# Altium PCB SolarSense.PcbDoc (part 1 of 2)
Units mm, origin at the board's own origin, x right, y up, seen from the top; angles counter-clockwise.
Board outline 200 x 150 mm, 2 copper layers (Top Layer, Bottom Layer); 190 components, 120 nets, 670 pads, 0 vias.
Unrouted connection lines stored in the file: 491.
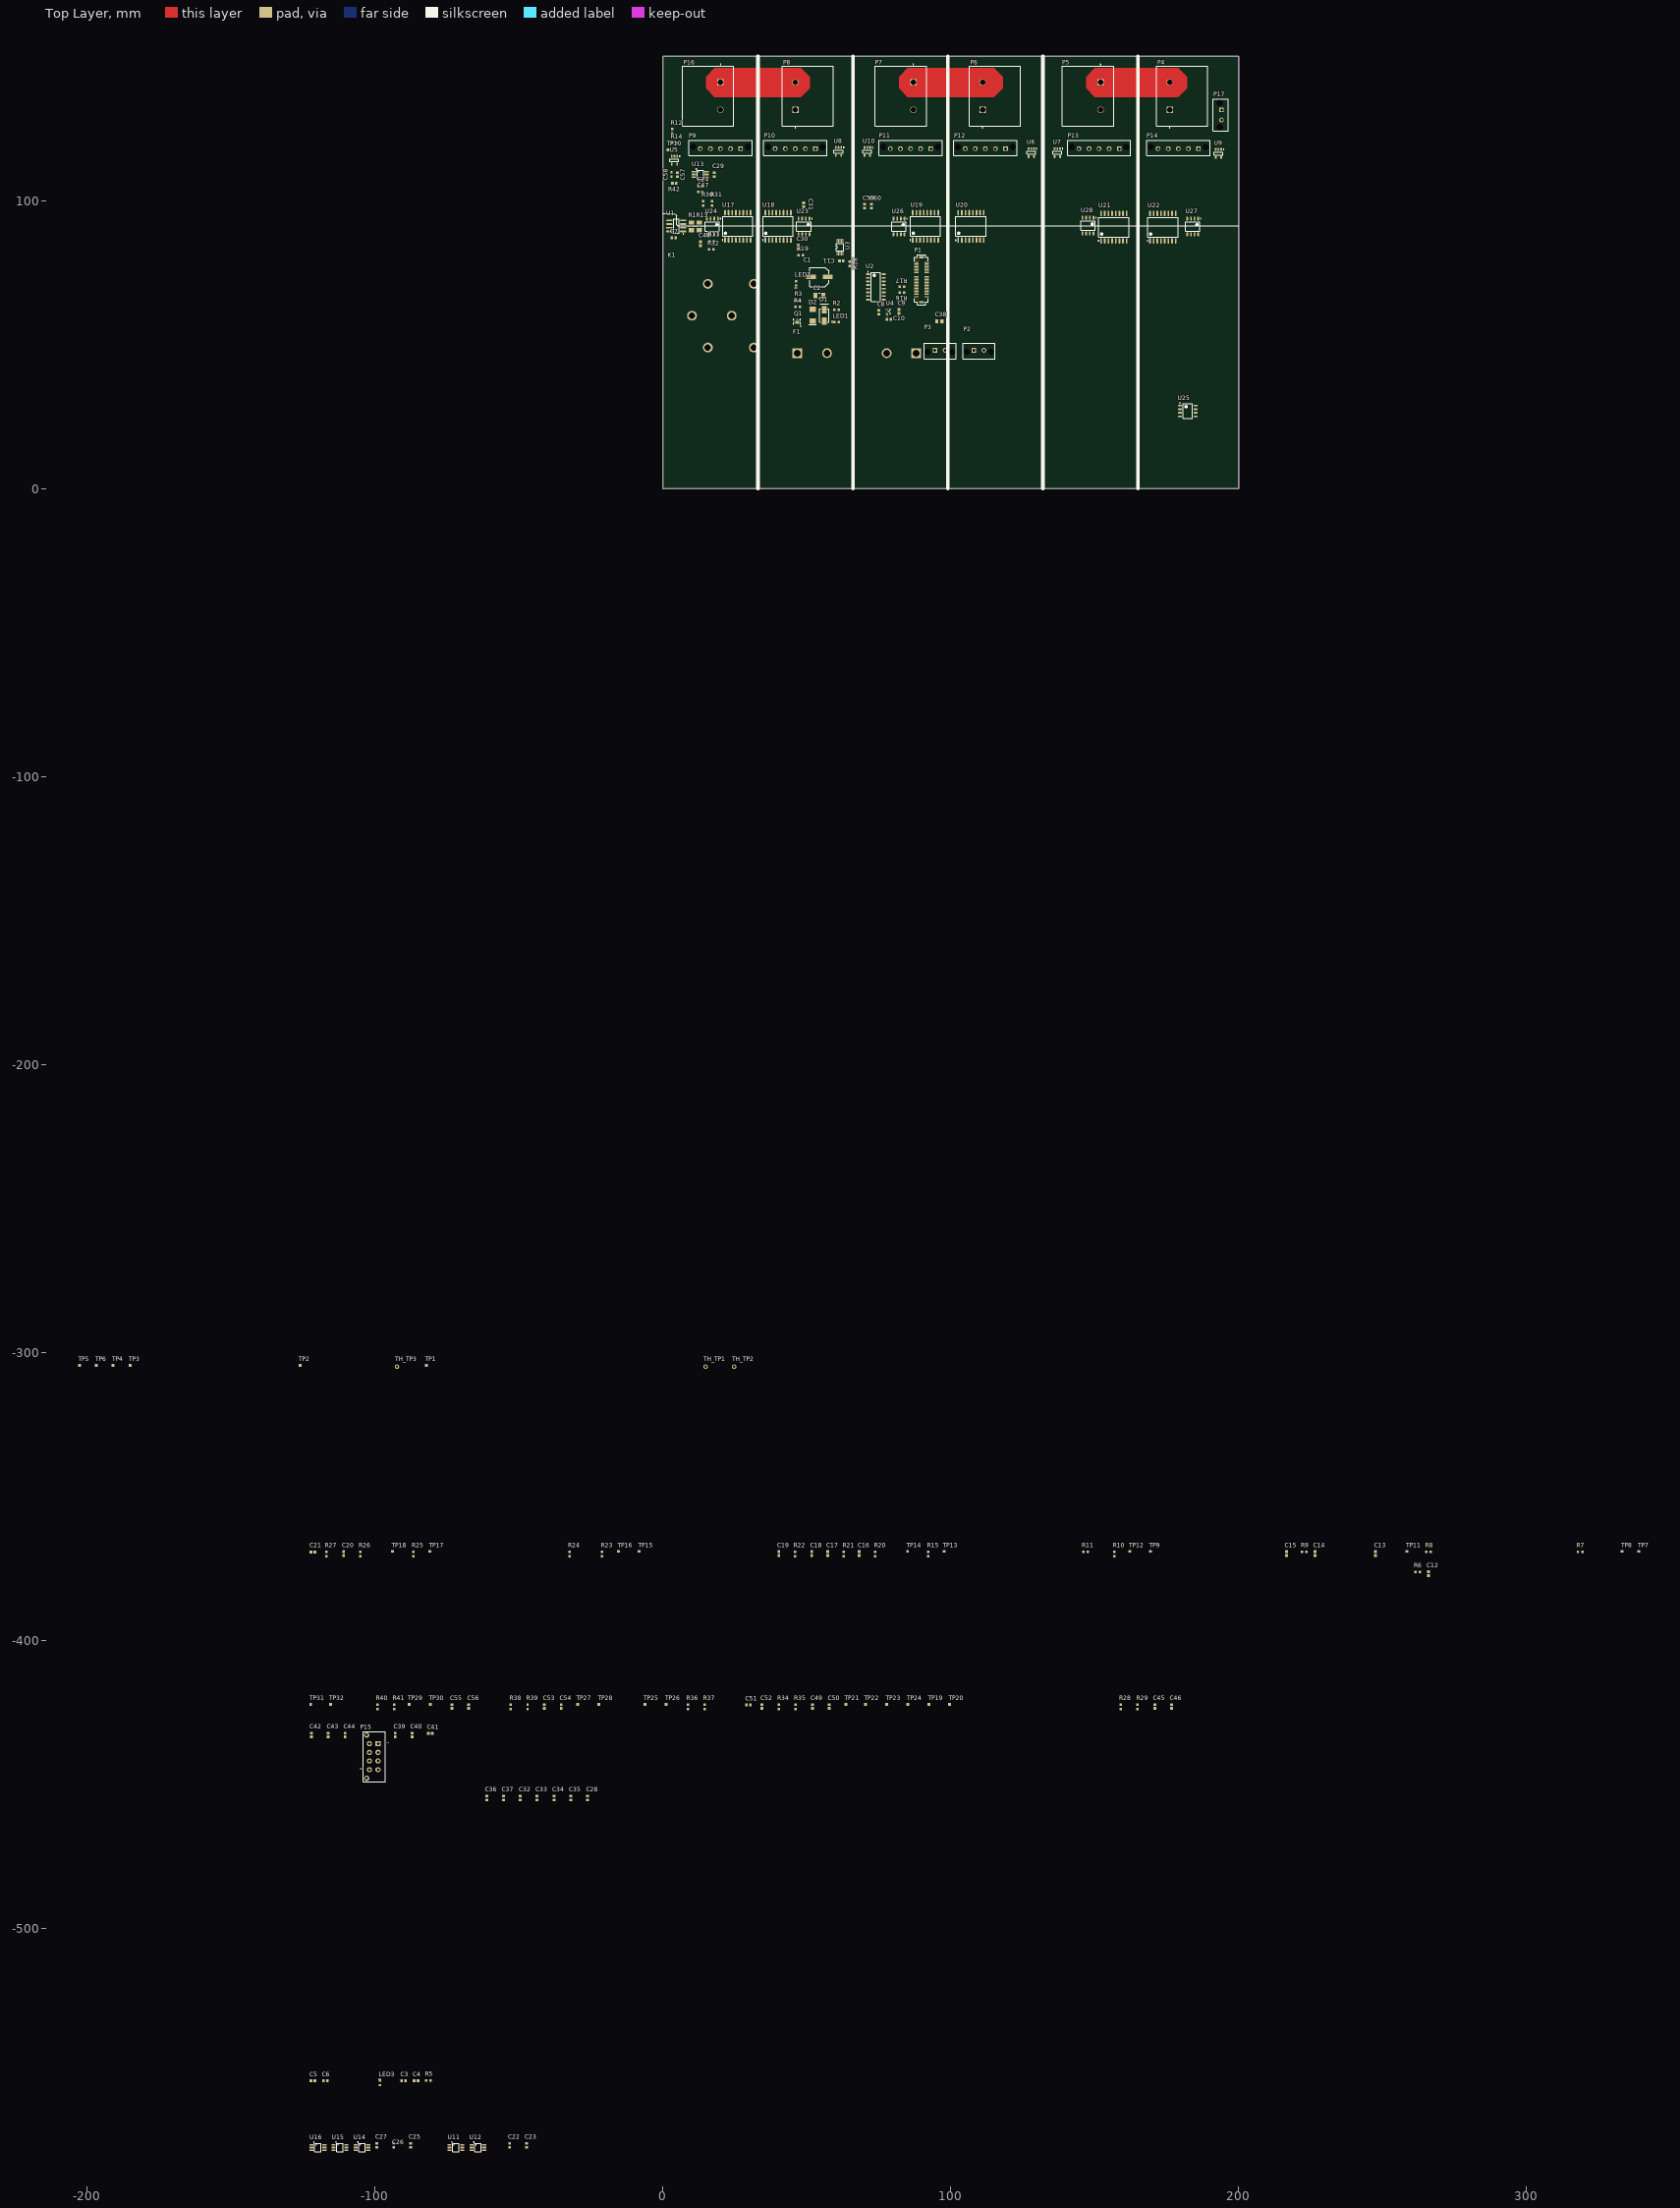
[diagram p0: Top Layer view]
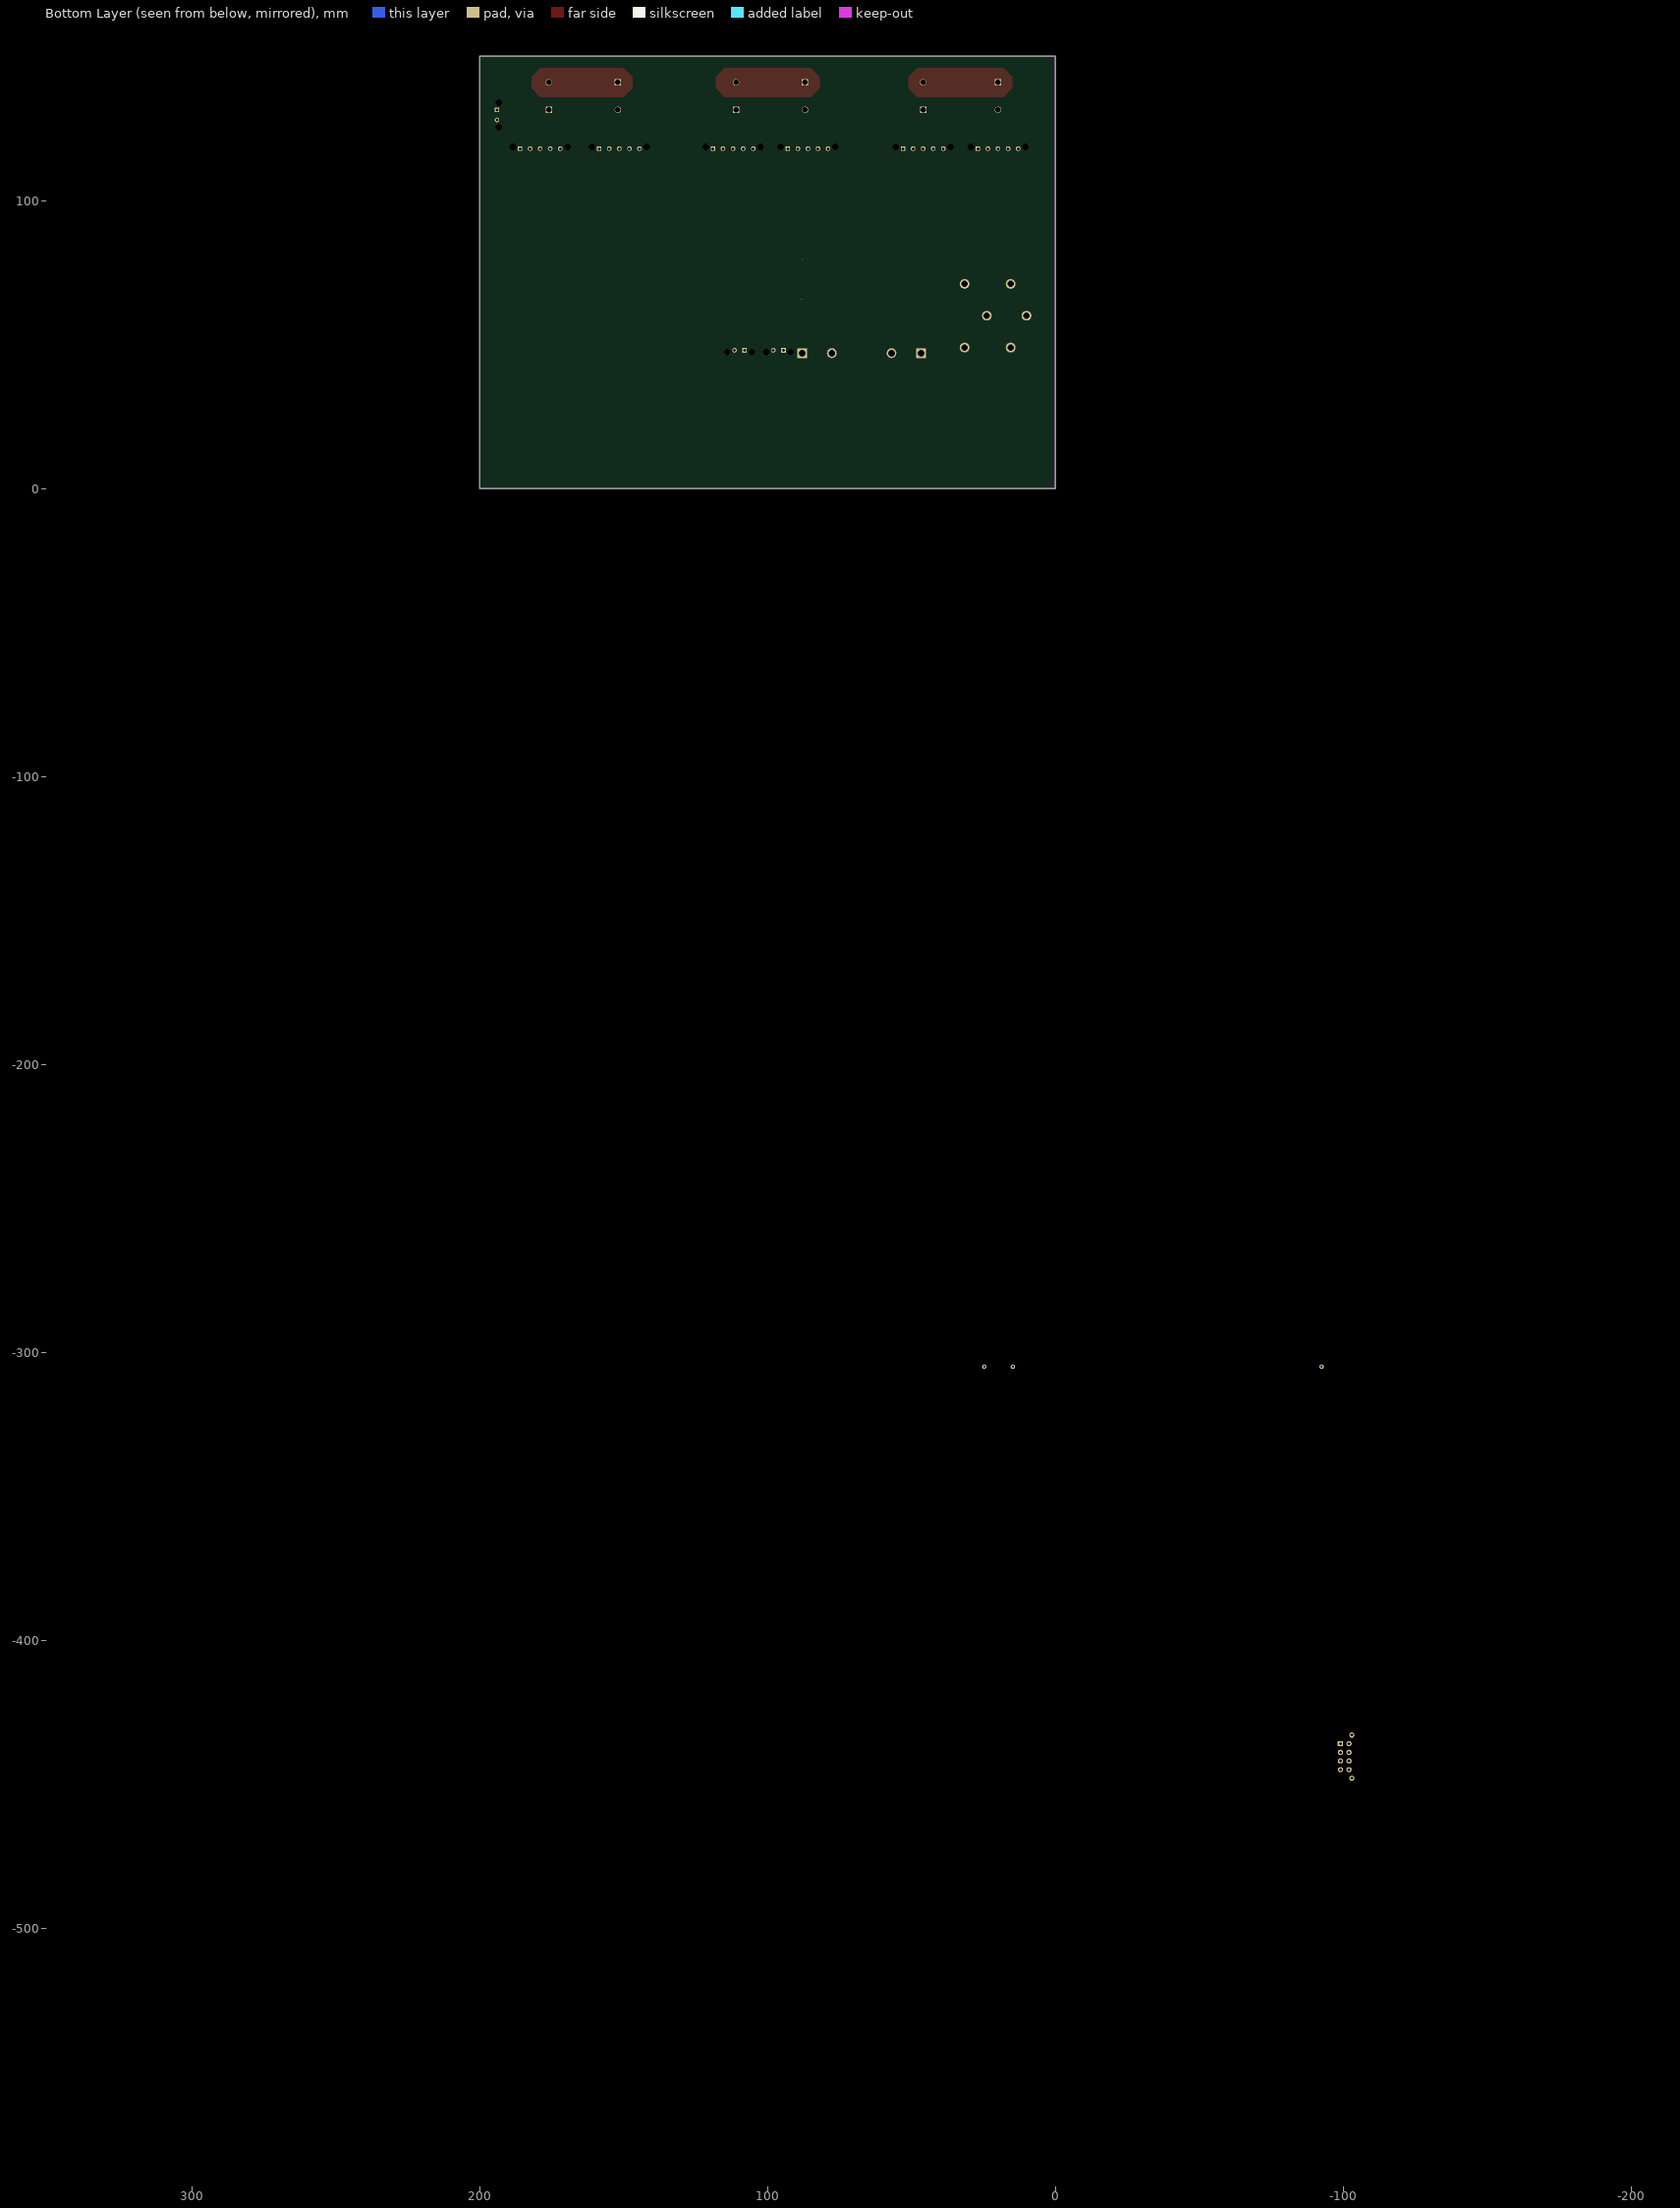
[diagram p1: Bottom Layer view, seen from below]

## Layer stack, top to bottom
Top Solder: solder mask 0.0102, Solder Resist, Dk 3.5
Top Layer: signal copper 0.0356
Dielectric 1: dielectric 0.32, FR-4, Dk 4.8
Bottom Layer: signal copper 0.0356
Bottom Solder: solder mask 0.0102, Solder Resist, Dk 3.5

## Board outline
0,0 0,150 200,150 200,0

## Design rules (kind name [scope] priority, off if disabled: settings)
Clearance [All] p1: gap=0.254 ignorepadtopadclearanceinfootprint=FALSE except(0: Arc-Hole Track-Hole SMDPad-Hole THPad-Hole Via-Hole Fill-Hole Poly-Hole Region-Hole Text-Hole)
PolygonConnect [All] p1: connectstyle=Relief reliefconductorwidth=0.254 reliefentries=4 polygonreliefangle="90 Angle" airgapwidth=0.254
RoutingVias [All] p1: holewidth=0.711 width=1.27 viastyle="Through Hole" minholewidth=0.711 minwidth=1.27 maxholewidth=0.711 maxwidth=1.27
SolderMaskExpansion [All] p1: expansion=0.102 istentingtop=FALSE
Width [All] p1: maxlimit=0.254 minlimit=0.254 preferedwidth=0.254
30 further rules are at their usual default settings.

## Classes and differential pairs
net class HV: HV_HIGH MPPT_GND_2 MPPT_GND_3 MPPT_GND_4 MPPT_GND_5 MPPT_GND_6 NetR6_2 NetR9_2 NetR10_2 NetR12_2 NetR22_2 NetR23_2
net class 10A: HV_HIGH_NEG_BAT_TERM HV_LOW NetF1_2 NetK1_4
component class Voltage_Sense: C12 C13 C14 C15 C16 C17 C18 C19 C20 C21 C57 C58 P4 P5 P6 P7 P8 P16 R6 R7 R8 R9 R10 R11 R12 R14 R15 R20 R21 R22 R23 R24 R25 R26 R27 R42 TP7 TP8 TP9 TP10 TP11 TP12 TP13 TP14 TP15 TP16 TP17 TP18 U5 U6 U7 U8 U9 U10
component class V_Sns_I2C_Isolators: C45 C46 C47 C48 C49 C50 C51 C52 C53 C54 C55 C56 R28 R29 R30 R31 R32 R33 R34 R35 R36 R37 R38 R39 R40 R41 TP19 TP20 TP21 TP22 TP23 TP24 TP25 TP26 TP27 TP28 TP29 TP30 TP31 TP32 U23 U24 U25 U26 U27 U28
component class TemperatureSense: C39 C40 C41 C42 C43 C44 P15
component class SPI_Interface: C28 C29 C30 C31 C32 C33 C34 C35 C36 C37 C59 C60 P9 P10 P11 P12 P13 P14 U17 U18 U19 U20 U21 U22
component class I2C_Interface: C8 C9 C10 C11 R16 R17 R18 U3 U4
component class Current_and_Relay_Sense: C1 C2 C7 C38 D1 D2 F1 K1 LED1 LED2 P2 P3 P17 Q1 R1 R2 R3 R4 R13 R19 TH_TP1 TH_TP2 TH_TP3 TP1 TP2 TP3 TP4 TP5 TP6 U1
component class Controller_Board_Interface: C3 C4 C5 C6 LED3 P1 R5 U2
component class ADCs: C22 C23 C24 C25 C26 C27 U11 U12 U13 U14 U15 U16

## Components (designator, comment, footprint, x,y, rotation, side; value= is the part's Value field where it differs from the comment)
C1 "EEE-1HA4R7NP" "CAP ALUM 6.3MM RADIAL SMD" 54.349,73.438 r180 top
C2 "CAP CER 2.2UF 100V ±20% X7R 1206" "CAP, 1206" 54.349,67 r180 top
C3 "CAP CER 0.1UF 50V 10% X7R 0603" "CAP, 0603" -90.037,-552.93 r0 top
C4 "CAP CER 4.7UF 25V 10% X5R 0603" "CAP, 0603" -85.719,-552.93 r0 top
C5 "CAP CER 0.1UF 50V 10% X7R 0603" "CAP, 0603" -121.533,-552.93 r0 top
C6 "CAP CER 4.7UF 25V 10% X5R 0603" "CAP, 0603" -117.215,-552.93 r0 top
C7 "CAP CER 0.1UF 50V 10% X7R 0603" "CAP, 0603" 3.769,87 r0 top
C8 "CAP CER 0.1UF 50V 10% X7R 0603" "CAP, 0603" 75,61.172 r90 top
C9 "CAP CER 1UF 50V 10% X7R 0603" "CAP, 0603" 82,61.467 r270 top
C10 "CAP CER 1UF 50V 10% X7R 0603" "CAP, 0603" 78.5,58.7 r0 top
C11 "CAP CER 0.1UF 50V 10% X7R 0603" "CAP, 0603" 62,79 r180 top
C12 "CAP CER 0.1UF 50V 10% X7R 0603" "CAP, 0603" 265.831,-376.796 r90 top
C13 "CAP CER 10nF 50V 5% X7R 0603" "CAP, 0603" 247.529,-369.796 r90 top
C14 "CAP CER 0.1UF 50V 10% X7R 0603" "CAP, 0603" 226.447,-369.796 r90 top
C15 "CAP CER 0.1UF 50V 10% X7R 0603" "CAP, 0603" 216.541,-369.796 r90 top
C16 "CAP CER 10nF 50V 5% X7R 0603" "CAP, 0603" 68.205,-369.796 r90 top
C17 "CAP CER 10nF 50V 5% X7R 0603" "CAP, 0603" 57.283,-369.796 r90 top
C18 "CAP CER 0.1UF 50V 10% X7R 0603" "CAP, 0603" 51.695,-369.796 r90 top
C19 "CAP CER 0.1UF 50V 10% X7R 0603" "CAP, 0603" 40.265,-369.796 r90 top
C20 "CAP CER 10nF 50V 5% X7R 0603" "CAP, 0603" -110.865,-369.796 r90 top
C21 "CAP CER 10nF 50V 5% X7R 0603" "CAP, 0603" -121.533,-369.288 r0 top
C22 "CAP CER 0.1UF 50V 10% X7R 0603" "CAP, 0603" -53.207,-575.282 r90 top
C23 "CAP CER 0.1UF 50V 10% X7R 0603" "CAP, 0603" -47.365,-575.282 r90 top
C24 "CAP CER 0.1UF 50V 10% X7R 0603" "CAP, 0603" 13,105 r180 top
C25 "CAP CER 0.1UF 50V 10% X7R 0603" "CAP, 0603" -87.624,-575.282 r90 top
C26 "CAP CER 0.1UF 50V 10% X7R 0603" "CAP, 0603" -93.466,-575.282 r90 top
C27 "CAP CER 0.1UF 50V 10% X7R 0603" "CAP, 0603" -99.308,-575.282 r90 top
C28 "CAP CER 0.1UF 50V 10% X7R 0603" "CAP, 0603" -26.156,-454.632 r90 top
C29 "CAP CER 0.1UF 50V 10% X7R 0603" "CAP, 0603" 17.835,109 r90 top
C30 "CAP CER 0.1UF 50V 10% X7R 0603" "CAP, 0603" 46.952,83.8 r90 top
C31 "CAP CER 0.1UF 50V 10% X7R 0603" "CAP, 0603" 48.886,98.478 r270 top
C32 "CAP CER 0.1UF 50V 10% X7R 0603" "CAP, 0603" -49.524,-454.632 r90 top
C33 "CAP CER 0.1UF 50V 10% X7R 0603" "CAP, 0603" -43.682,-454.632 r90 top
C34 "CAP CER 0.1UF 50V 10% X7R 0603" "CAP, 0603" -37.84,-454.632 r90 top
C35 "CAP CER 0.1UF 50V 10% X7R 0603" "CAP, 0603" -31.998,-454.632 r90 top
C36 "CAP CER 0.1UF 50V 10% X7R 0603" "CAP, 0603" -61.208,-454.632 r90 top
C37 "CAP CER 0.1UF 50V 10% X7R 0603" "CAP, 0603" -55.366,-454.632 r90 top
C38 "CAP CER 10uF 25V 10% X5R 0805" "CAP, 0805" 96,58 r0 top
C39 "CAP CER 0.1UF 50V 10% X7R 0603" "CAP, 0603" -92.958,-432.788 r90 top
C40 "CAP CER 0.1UF 50V 10% X7R 0603" "CAP, 0603" -87.116,-432.788 r90 top
C41 "CAP CER 0.1UF 50V 10% X7R 0603" "CAP, 0603" -80.766,-432.28 r0 top
C42 "CAP CER 0.1UF 50V 10% X7R 0603" "CAP, 0603" -122.041,-432.788 r90 top
C43 "CAP CER 0.1UF 50V 10% X7R 0603" "CAP, 0603" -116.199,-432.788 r90 top
C44 "CAP CER 0.1UF 50V 10% X7R 0603" "CAP, 0603" -110.357,-432.788 r90 top
C45 "CAP CER 0.1UF 50V 10% X7R 0603" "CAP, 0603" 170.821,-422.882 r90 top
C46 "CAP CER 0.1UF 50V 10% X7R 0603" "CAP, 0603" 176.663,-422.882 r90 top
C47 "CAP CER 0.1UF 50V 10% X7R 0603" "CAP, 0603" 13,103 r180 top
C48 "CAP CER 0.1UF 50V 10% X7R 0603" "CAP, 0603" 13,85 r90 top
C49 "CAP CER 0.1UF 50V 10% X7R 0603" "CAP, 0603" 51.949,-422.882 r90 top
C50 "CAP CER 0.1UF 50V 10% X7R 0603" "CAP, 0603" 57.791,-422.882 r90 top
C51 "CAP CER 0.1UF 50V 10% X7R 0603" "CAP, 0603" 29.724,-422.374 r0 top
C52 "CAP CER 0.1UF 50V 10% X7R 0603" "CAP, 0603" 34.423,-422.882 r90 top
C53 "CAP CER 0.1UF 50V 10% X7R 0603" "CAP, 0603" -41.142,-422.882 r90 top
C54 "CAP CER 0.1UF 50V 10% X7R 0603" "CAP, 0603" -35.3,-422.882 r90 top
C55 "CAP CER 0.1UF 50V 10% X7R 0603" "CAP, 0603" -73.273,-422.882 r90 top
C56 "CAP CER 0.1UF 50V 10% X7R 0603" "CAP, 0603" -67.431,-422.882 r90 top
C57 "CAP CER 0.1UF 50V 10% X7R 0603" "CAP, 0603" 5,109 r270 top
C58 "CAP CER 10nF 50V 5% X7R 0603" "CAP, 0603" 4,106 r0 top
C59 "CAP CER 0.1UF 50V 10% X7R 0603" "CAP, 0603" 70,98 r90 top
C60 "CAP CER 0.1UF 50V 10% X7R 0603" "CAP, 0603" 72.4,98 r90 top
D1 "DIODE SCHOTTKY 60V 3A SMA" "Diode, SMA" 56,58.092 r90 top
D2 "DIODE ZENER 16V 5W DO-214AA (SMB)" "DO-214AA Diode" 52,62.212 r270 top
F1 "FUSE 12 A 600VAC/DC KLM-12" "FUSE CLIPS 1A3400-09-R" 87.99,47 r180 top
K1 "RELAY SPST 12V 10A" "RELAY SOCKET P7M-06P" 23,60 r90 top
LED1 "LED YELLOW CLEAR 2.1V 0603" LED_0603 61,57.838 r180 top
LED2 "LED GREEN CLEAR 2V 0603" LED_0603 46.179,71.932 r270 top
LED3 "LED GREEN CLEAR 2V 0603" LED_0603 -98.292,-554.327 r90 top
P1 "CONN 50POS Bergstak Plug 0.02\"" "CONN, Bergstak 50 Pos Plug" 89.8,72.5 r0 top
P2 "CONN 2POS ULTRA-FIT 0.138\"" "CONN, 2POS ULTRA-FIT" 108,48 r0 top
P3 "CONN 2POS ULTRA-FIT 0.138\"" "CONN, 2POS ULTRA-FIT" 94.5,48 r0 top
P4 "CONN BARRIER STRIP 2CIRC 0.375\"" TE_3-1437652-9 176,131.47 r90 top
P5 "CONN BARRIER STRIP 2CIRC 0.375\"" TE_3-1437652-9 152,141 r270 top
P6 "CONN BARRIER STRIP 2CIRC 0.375\"" TE_3-1437652-9 111,131.47 r90 top
P7 "CONN BARRIER STRIP 2CIRC 0.375\"" TE_3-1437652-9 87,141 r270 top
P8 "CONN BARRIER STRIP 2CIRC 0.375\"" TE_3-1437652-9 46,131.47 r90 top
P9 "CONN 5POS ULTRA-FIT 0.138\"" "CONN, 5POS ULTRA-FIT" 27,118 r180 top
P10 "CONN 5POS ULTRA-FIT 0.138\"" "CONN, 5POS ULTRA-FIT" 53,118 r180 top
P11 "CONN 5POS ULTRA-FIT 0.138\"" "CONN, 5POS ULTRA-FIT" 93,118 r180 top
P12 "CONN 5POS ULTRA-FIT 0.138\"" "CONN, 5POS ULTRA-FIT" 119,118 r180 top
P13 "CONN 5POS ULTRA-FIT 0.138\"" "CONN, 5POS ULTRA-FIT" 158.5,118 r180 top
P14 "CONN 5POS ULTRA-FIT 0.138\"" "CONN, 5POS ULTRA-FIT" 186,118 r180 top
P15 "CONN 8POS MICRO-FIT 3mm" "CONN, 8POS MICRO-FIT" -98.927,-435.836 r90 top
P16 "CONN BARRIER STRIP 2CIRC 0.375\"" TE_3-1437652-9 20,141 r270 top
P17 "CONN 2POS ULTRA-FIT 0.138\"" "CONN, 2POS ULTRA-FIT" 194,131.47 r270 top
Q1 "MOSFET N-CH 30V 8.7A 2.1W 6-PQFN (2x2)" "MOSFET N-CH 30V 12A 2mmx2mm PQFN" 47.571,57.31 r90 top
R1 "RES 0.0 OHM 3/4W 1206" "RES 1206" 9.895,91 r90 top
R2 "RES 4.7K OHM 1% 1/10W 0603" "RES, 0603" 60.309,62.092 r0 top
R3 "RES 22.1 OHM 1% 1/10W 0603" "RES, 0603" 46.914,65.318 r0 top
R4 "RES 10K OHM 1% 1/10W 0603" "RES, 0603" 46.775,63 r0 top
R5 "RES 3.3K OHM 1% 1/4W 0603" "RES, 0603" -81.401,-552.803 r0 top
R6 "RES 470K OHM 1% 1/4W 0603" "RES, 0603" 262.148,-376.161 r0 top
R7 "RES 100 OHM 1% 1/10W 0603" "RES, 0603" 318.522,-369.161 r0 top
R8 "RES 26.1K OHM 1% 1/10W 0603" "RES, 0603" 265.944,-369.161 r0 top
R9 "RES 470K OHM 1% 1/4W 0603" "RES, 0603" 222.764,-369.161 r0 top
R10 "RES 470K OHM 1% 1/4W 0603" "RES, 0603" 156.724,-369.923 r90 top
R11 "RES 100 OHM 1% 1/10W 0603" "RES, 0603" 146.818,-369.161 r0 top
R12 "RES 470K OHM 1% 1/4W 0603" "RES, 0603" 3.225,124 r270 top
R13 "RES 0.0 OHM 3/4W 1206" "RES 1206" 12.675,91 r90 top
R14 "RES 26.1K OHM 1% 1/10W 0603" "RES, 0603" 4,120 r0 top
R15 "RES 26.1K OHM 1% 1/10W 0603" "RES, 0603" 92.208,-369.923 r90 top
R16 "RES 4.7K OHM 1% 1/10W 0603" "RES, 0603" 83,68 r0 top
R17 "RES 4.7K OHM 1% 1/10W 0603" "RES, 0603" 83,70 r0 top
R18 "RES 100 OHM 1% 1/10W 0603" "RES, 0603" 64.762,78 r90 top
R19 "RES 510 OHM 5% 1/10W 0603" "RES, 0603" 47.825,81 r0 top
R20 "RES 100 OHM 1% 1/10W 0603" "RES, 0603" 73.793,-369.923 r90 top
R21 "RES 26.1K OHM 1% 1/10W 0603" "RES, 0603" 62.871,-369.923 r90 top
R22 "RES 470K OHM 1% 1/4W 0603" "RES, 0603" 45.853,-369.923 r90 top
R23 "RES 470K OHM 1% 1/4W 0603" "RES, 0603" -21.076,-369.923 r90 top
R24 "RES 100 OHM 1% 1/10W 0603" "RES, 0603" -32.379,-369.923 r90 top
R25 "RES 26.1K OHM 1% 1/10W 0603" "RES, 0603" -86.608,-369.923 r90 top
R26 "RES 100 OHM 1% 1/10W 0603" "RES, 0603" -105.15,-369.923 r90 top
R27 "RES 26.1K OHM 1% 1/10W 0603" "RES, 0603" -116.834,-369.923 r90 top
R28 "1K" "RES, 0603" 159.01,-423.009 r90 top
R29 "1K" "RES, 0603" 164.852,-423.009 r90 top
R30 "1K" "RES, 0603" 13.925,99 r270 top
R31 "1K" "RES, 0603" 17,99 r270 top
R32 "1K" "RES, 0603" 16.775,83 r180 top
R33 "1K" "RES, 0603" 17,86 r180 top
R34 "1K" "RES, 0603" 40.265,-423.009 r90 top
R35 "1K" "RES, 0603" 46.107,-423.009 r90 top
R36 "1K" "RES, 0603" 8.642,-423.009 r90 top
R37 "1K" "RES, 0603" 14.484,-423.009 r90 top
R38 "1K" "RES, 0603" -52.826,-423.009 r90 top
R39 "1K" "RES, 0603" -46.984,-423.009 r90 top
R40 "1K" "RES, 0603" -99.181,-423.009 r90 top
R41 "1K" "RES, 0603" -93.339,-423.009 r90 top
R42 "RES 100 OHM 1% 1/10W 0603" "RES, 0603" 3,109 r270 top
TH_TP1 "HV HIGH" "Thru Test Point" 14.839,-304.931 r90 top
TH_TP2 "HV CURRENT SENSE" "Thru Test Point" 24.745,-304.931 r90 top
TH_TP3 "HV LOW" "Thru Test Point" -92.349,-304.931 r90 top
TP1 "CURRENT SENSE OUT" "Test Point" -82.189,-304.423 r90 top
TP2 "SOLAR RELAY GND" "Test Point" -126.004,-304.423 r90 top
TP3 "SOLAR RELAY" "Test Point" -185.059,-304.423 r90 top
TP4 "GND" "Test Point" -190.901,-304.423 r90 top
TP5 "12V" "Test Point" -202.585,-304.423 r90 top
TP6 "3V3" "Test Point" -196.743,-304.423 r90 top
TP7 "SCALED_VOLT_SENSE" "Test Point" 338.969,-369.034 r90 top
TP8 "VOLT_SENSE_OUT" "Test Point" 333.127,-369.034 r90 top
TP9 "SCALED_VOLT_SENSE" "Test Point" 169.297,-369.034 r90 top
TP10 "SCALED_VOLT_SENSE" "Test Point" 1.762,117.648 r90 top
TP11 "VOLT_SENSE_OUT" "Test Point" 258.451,-369.034 r90 top
TP12 "VOLT_SENSE_OUT" "Test Point" 162.185,-369.034 r90 top
TP13 "SCALED_VOLT_SENSE" "Test Point" 97.669,-369.034 r90 top
TP14 "VOLT_SENSE_OUT" "Test Point" 84.969,-369.034 r90 top
TP15 "SCALED_VOLT_SENSE" "Test Point" -8.249,-369.034 r90 top
TP16 "VOLT_SENSE_OUT" "Test Point" -15.361,-369.034 r90 top
TP17 "SCALED_VOLT_SENSE" "Test Point" -80.893,-369.034 r90 top
TP18 "VOLT_SENSE_OUT" "Test Point" -93.847,-369.034 r90 top
TP19 "ASCL" "Test Point" 92.462,-422.12 r90 top
TP20 "ASDA" "Test Point" 99.574,-422.12 r90 top
TP21 "ASCL" "Test Point" 63.506,-422.12 r90 top
TP22 "ASDA" "Test Point" 70.364,-422.12 r90 top
TP23 "BSCL" "Test Point" 77.73,-422.12 r90 top
TP24 "BSDA" "Test Point" 85.096,-422.12 r90 top
TP25 "ASCL" "Test Point" -6.217,-422.12 r90 top
TP26 "ASDA" "Test Point" 1.149,-422.12 r90 top
TP27 "ASCL" "Test Point" -29.585,-422.12 r90 top
TP28 "ASDA" "Test Point" -22.219,-422.12 r90 top
TP29 "ASCL" "Test Point" -88.132,-422.12 r90 top
TP30 "ASDA" "Test Point" -80.766,-422.12 r90 top
TP31 "ASCL" "Test Point" -122.295,-422.12 r90 top
TP32 "ASDA" "Test Point" -115.437,-422.12 r90 top
U1 "IC CURRENT SENSOR HALL EFFECT 8-SOIC" SOIC8 4.675,91.2 r180 top
U2 "IC DECODER 3-8 MC74LVX138 LINE ADV 16-SOIC" "SOIC-16 CASE 751B-05 ISSUE K MC74LVX138" 74,70 r0 top
U3 "Quad ADC" "IC ADC VSSOP10" 60.5,81.6 r90 top
U4 "MIC94310" "IC REG LDO 3V 0.2A 4-TDFN" 78.164,60.752 r0 top
U5 "IC OP AMP GEN PURPOSE RR 10MHZ SOT-23-5" "IC OP AMP GP RR 10MHZ SOT-23-5" 4,114 r270 top
U6 "IC OP AMP GEN PURPOSE RR 10MHZ SOT-23-5" "IC OP AMP GP RR 10MHZ SOT-23-5" 127.95,116.625 r270 top
U7 "IC OP AMP GEN PURPOSE RR 10MHZ SOT-23-5" "IC OP AMP GP RR 10MHZ SOT-23-5" 137,116.625 r270 top
U8 "IC OP AMP GEN PURPOSE RR 10MHZ SOT-23-5" "IC OP AMP GP RR 10MHZ SOT-23-5" 61,117 r270 top
U9 "IC OP AMP GEN PURPOSE RR 10MHZ SOT-23-5" "IC OP AMP GP RR 10MHZ SOT-23-5" 192.95,116.375 r270 top
U10 "IC OP AMP GEN PURPOSE RR 10MHZ SOT-23-5" "IC OP AMP GP RR 10MHZ SOT-23-5" 71,117 r270 top
U11 "IC ADC MCP3427 10MSOP" "IC ADC MCP3427" -71.876,-576.044 r0 top
U12 "IC ADC MCP3427 10MSOP" "IC ADC MCP3427" -64.256,-576.044 r0 top
U13 "IC ADC MCP3427 10MSOP" "IC ADC MCP3427" 13,109 r0 top
U14 "IC ADC MCP3427 10MSOP" "IC ADC MCP3427" -104.515,-576.044 r0 top
U15 "IC ADC MCP3427 10MSOP" "IC ADC MCP3427" -112.135,-576.044 r0 top
U16 "IC ADC MCP3427 10MSOP" "IC ADC MCP3427" -119.755,-576.044 r0 top
U17 "IC DGTL ISO 5KV 4CH GEN PURP 16SOIC" "ISOW7841FDWER SOIC-16" 26,91 r90 top
U18 "IC DGTL ISO 5KV 4CH GEN PURP 16SOIC" "ISOW7841FDWER SOIC-16" 40,91 r90 top
U19 "IC DGTL ISO 5KV 4CH GEN PURP 16SOIC" "ISOW7841FDWER SOIC-16" 91.2,91 r90 top
U20 "IC DGTL ISO 5KV 4CH GEN PURP 16SOIC" "ISOW7841FDWER SOIC-16" 107,91 r90 top
U21 "IC DGTL ISO 5KV 4CH GEN PURP 16SOIC" "ISOW7841FDWER SOIC-16" 156.635,90.75 r90 top
U22 "IC DGTL ISO 5KV 4CH GEN PURP 16SOIC" "ISOW7841FDWER SOIC-16" 173.635,90.75 r90 top
U23 "IC DGTL ISO 2.5KV 2CH I2C 8SOIC ISO1540DR" "SOIC-8 ISO1540DR" 49,91 r270 top
U24 "IC DGTL ISO 2.5KV 2CH I2C 8SOIC ISO1540DR" "SOIC-8 ISO1540DR" 17.2,91 r270 top
U25 "IC DGTL ISO 2.5KV 2CH I2C 8SOIC ISO1540DR" "SOIC-8 ISO1540DR" 182.275,26.905 r0 top
U26 "IC DGTL ISO 2.5KV 2CH I2C 8SOIC ISO1540DR" "SOIC-8 ISO1540DR" 82,91 r270 top
U27 "IC DGTL ISO 2.5KV 2CH I2C 8SOIC ISO1540DR" "SOIC-8 ISO1540DR" 184,91 r270 top
U28 "IC DGTL ISO 2.5KV 2CH I2C 8SOIC ISO1540DR" "SOIC-8 ISO1540DR" 147.635,91.275 r270 top

## Footprints (in the part's own frame and the unit in brackets; to place one, negate y for a bottom-side part, rotate by r counter-clockwise, add the part's x,y. Pads: shape width x height; smd on the part's side, far side on the other; paste and mask are expansions set on the pad)
"CAP ALUM 6.3MM RADIAL SMD" [mm] "Aluminum Electrolytic Capacitor, Body 6.50x6.50x5.50mm, IPC Low Density"
  rect 3.45x1.55 smd: 1(-2.95,0) 2(2.95,0)
  silkscreen extent -3.3,-3.3 3.3,3.3, body extent -3.9,-3.3 3.9,3.3, height 5.5
"CAP, 0603" [mm] "Chip Capacitor, 2-Leads, Body 1.60x0.81mm, IPC Medium Density"
  rect 0.9x1 smd mask+0.076: 1(-0.675,0) 2(0.675,0)
  body extent -0.87,-0.48 0.87,0.48, height 0.9
"CAP, 0805" [mm] "Chip Capacitor, 2-Leads, Body 2.00x1.25mm, IPC Medium Density"
  rect 1.15x1.4 smd: 1(-0.875,0) 2(0.875,0)
  body extent -1,-0.63 1,0.63, height 1.25
"CAP, 1206" [mm] "Chip Capacitor, 2-Leads, Body 3.20x1.60mm, IPC Medium Density"
  rect 1.4x1.8 smd: 1(-1.375,0) 2(1.375,0)
  silkscreen extent -0.3,-0.8 0.3,0.8, body extent -1.68,-0.87 1.67,0.87, height 1.8
"CONN, 2POS ULTRA-FIT" [mm] "2 Positions Header, Shrouded Connector 0.138\" (3.50mm) Through Hole Gold"
  rect 1.6x1.6 hole 1.02: 1(0,0)
  round 1.6 hole 1.02: 2(3.5,0)
  round 1.6 hole 2.3: ""(-2.5,-0.63) ""(6,-0.63)
  silkscreen extent -3.74,-2.93 7.33,2.37, body extent -3.48,-2.87 7.12,5.79, height 13.85
"CONN, 5POS ULTRA-FIT" [mm]
  rect 1.6x1.6 hole 1.02: 1(0,0)
  round 1.6 hole 1.02: 2(3.5,0) 3(7,0) 4(10.5,0) 5(14,0)
  round 0 hole 2.3: ""(-2.5,-0.63) ""(16.5,-0.63)
  silkscreen extent -4,-2.93 18,2.42, body extent -3.56,-2.84 17.54,5.82, height 13.85
"CONN, 8POS MICRO-FIT" [mm]
  round 1.8 hole 1.02: 0(-12,3.94) 0(3,3.94) 2(-3,0) 3(-6,0) 4(-9,0) 5(0,3) 6(-3,3) 7(-6,3) 8(-9,3)
  rect 1.8x1.8 hole 1.02: 1(0,0)
  silkscreen extent -13.2,-2.5 4.2,5.1, body extent -12.65,-2.48 3.5,6.29, height 9.95
"CONN, Bergstak 50 Pos Plug" [mm] "Bergstak 50 Position Plug"
  rect 1.6x0.3 smd: 1(1.8,6)
  oval 1.6x0.3 smd: 2(1.8,5.5) 3(1.8,5) 4(1.8,4.5) 5(1.8,4) 6(1.8,3.5) 7(1.8,3) 8(1.8,2.5) 9(1.8,2) 10(1.8,1.5) 11(1.8,1) 12(1.8,0.5) 13(1.8,0) 14(1.8,-0.5) 15(1.8,-1) 16(1.8,-1.5) 17(1.8,-2) 18(1.8,-2.5) 19(1.8,-3) 20(1.8,-3.5) 21(1.8,-4) 22(1.8,-4.5) 23(1.8,-5) 24(1.8,-5.5) 25(1.8,-6) 26(-1.8,-6) 27(-1.8,-5.5) 28(-1.8,-5) 29(-1.8,-4.5) 30(-1.8,-4) 31(-1.8,-3.5) 32(-1.8,-3) 33(-1.8,-2.5) 34(-1.8,-2) 35(-1.8,-1.5) 36(-1.8,-1) 37(-1.8,-0.5) 38(-1.8,0) 39(-1.8,0.5) 40(-1.8,1) 41(-1.8,1.5) 42(-1.8,2) 43(-1.8,2.5) 44(-1.8,3) 45(-1.8,3.5) 46(-1.8,4) 47(-1.8,4.5) 48(-1.8,5) 49(-1.8,5.5) 50(-1.8,6)
  round 0.7 hole 0.7: ""(-1.5,-7.05) ""(-1.5,7.05)
  rect 1.8x0.8 smd: ""(0,-7.8) ""(0,7.8)
  silkscreen extent -2.4,-8.7 2.4,8.7, body extent -2.3,-7.75 2.3,7.75, height 4.2
"Diode, SMA" [mm]
  rect 2.5x1.7 smd: 1(0,0) 2(4,0)
  silkscreen extent -0.25,-1.65 6,1.65, body extent -0.69,-1.45 4.59,1.47, height 2.41
"DO-214AA Diode" [mil] "Zener Diode 16V 5W SMBJ5353B-TP"
  rect 70x85 smd: 1(0,0) 2(160,0)
  silkscreen extent 209,-50 209,47, body extent -21,-60 187,55, height 95
"FUSE CLIPS 1A3400-09-R" [mm] "FUSE CLIP CARTRIDGE 20A PCB"
  rect 3.4x3.4 hole 2.35: 1(0,0) 2(41.28,0)
  round 3.4 hole 2.35: 1(10.29,0) 2(30.99,0)
  body extent 0,-6 41.28,6, height 18.03
"IC ADC MCP3427" [mm]
  rect 1.45x0.345 smd: 1(-2.2,1) 2(-2.2,0.5) 3(-2.2,0) 4(-2.2,-0.5) 5(-2.2,-1) 6(2.2,-1) 7(2.2,-0.5) 8(2.2,0) 9(2.2,0.5) 10(2.2,1)
  silkscreen extent -1.5,-1.5 1.1,2, body extent -2.45,-1.5 2.45,1.5, height 1.09
"IC ADC VSSOP10" [mm]
  rect 1.45x0.3 smd: 1(0,0)
  oval 1.45x0.3 smd: 2(0,-0.5) 3(0,-1) 4(0,-1.5) 5(0,-2) 6(4.4,-2) 7(4.4,-1.5) 8(4.4,-1) 9(4.4,-0.5) 10(4.4,0)
  silkscreen extent 1,-2.25 3.4,0.25, body extent -0.25,-2.5 4.65,0.5, height 1.15
"IC OP AMP GP RR 10MHZ SOT-23-5" [mm] "SOT23, 5-Leads, Body 2.90x2.80mm, Pitch 0.95mm, IPC Medium Density"
  rect 1x0.6 smd: 1(-1.375,0.95)
  rrect50% 1x0.6 smd: 2(-1.375,0) 3(-1.375,-0.95) 4(1.375,-0.95) 5(1.375,0.95)
  silkscreen extent -1.5,-1.55 0.5,1.93, body extent -1.5,-1.53 1.5,1.53, height 1.45
"IC REG LDO 3V 0.2A 4-TDFN" [mm] "QFN, 4-Leads, Body 1.20x1.60mm, Pitch 0.50mm/1.40mm, Thermal Pad 0.86x0.50mm, IPC Medium Density"
  rect 0.25x0.5 smd: 1(0,0) 2(0.6,0) 3(0.6,1.44) 4(0,1.44)
  rect 0.86x0.5 smd: 5(0.3,0.715)
  silkscreen extent -0.48,-0.56 1.07,1.54, body extent -0.33,-0.11 0.92,1.54, height 0.6
"ISOW7841FDWER SOIC-16" [mm] "SOIC, 16-Leads, Body 10.30x7.50mm, Pitch 1.27mm, IPC Medium Density"
  oval 1.9x0.6 smd: 1(-4.75,4.445) 2(-4.75,3.175) 3(-4.75,1.905) 4(-4.75,0.635) 5(-4.75,-0.635) 6(-4.75,-1.905) 7(-4.75,-3.175) 8(-4.75,-4.445) 9(4.75,-4.445) 10(4.75,-3.175) 11(4.75,-1.905) 12(4.75,-0.635) 13(4.75,0.635) 14(4.75,1.905) 15(4.75,3.175) 16(4.75,4.445)
  silkscreen extent -4.87,-5.25 3.4,5.42, body extent -3.8,-5.25 3.8,5.25, height 2.65
LED_0603 [mm]
  rect 0.8x0.8 smd: 1(-0.05,0.01) 2(1.45,0.01)
  silkscreen extent 2.13,-0.46 2.13,0.45, body extent -0.09,-0.39 1.51,0.41, height 0.8
"MOSFET N-CH 30V 12A 2mmx2mm PQFN" [mm] "PQFN, 6-Leads, Body 2.00x2.00mm, Pitch 0.65mm/0.50mm, Thermal Pad 1.00x1.20mm, IPC Medium Density"
  rect 0.4x0.25 smd: 1(0,0) 2(0.65,0) 3(1.3,0) 4(1.3,1.85) 5(0.65,1.85) 6(0,1.85)
  rect 1x1.2 smd: 7(0.35,0.925)
  rect 0.3x0.79 smd: 8(1.39,0.925)
  silkscreen extent -1.14,-0.38 1.7,2.12, body extent -0.4,-0.13 1.7,1.97, height 1
"RELAY SOCKET P7M-06P" [mm]
  round 3.4 hole 2.2: 2(0,12.9) 4(11.05,7.4) 6(-11.05,7.4) 8(0,-0.9) A(11.05,-8.6) B(-11.05,-8.6)
  body extent -19.5,-21.5 19.5,21.5, height 64
"RES 1206" [mm] "Chip Resistor, 2-Leads, Body 3.20x1.60mm, IPC Medium Density"
  rect 1.5x1.85 smd: 1(-1.325,0) 2(1.325,0)
  silkscreen extent -0.2,-0.82 0.2,0.82, body extent -1.73,-0.92 1.73,0.92, height 0.64
"RES, 0603" [mm] "Chip Resistor, 2-Leads, Body 1.60x0.80mm, IPC Medium Density"
  rect 0.85x0.85 smd: 1(-0.775,0) 2(0.775,0)
  body extent -0.8,-0.4 0.8,0.4, height 0.55
SOIC8 [mm]
  oval 2.2x0.6 smd: 1(-2.394,1.935) 2(-2.394,0.665) 3(-2.394,-0.605) 4(-2.394,-1.875) 5(2.406,-1.875) 6(2.406,-0.605) 7(2.406,0.665) 8(2.406,1.935)
  silkscreen extent -2.52,-2.47 0.91,2.91, body extent -1.99,-2.47 2.01,2.53, height 1.75
"SOIC-8 ISO1540DR" [mm] "SOIC, 8-Leads, Body 4.91x3.90mm, Pitch 1.27mm, IPC Medium Density"
  oval 1.45x0.6 smd: 1(-2.725,1.905) 2(-2.725,0.635) 3(-2.725,-0.635) 4(-2.725,-1.905) 5(2.725,-1.905) 6(2.725,-0.635) 7(2.725,0.635) 8(2.725,1.905)
  silkscreen extent -2.85,-2.5 1.6,2.88, body extent -2,-2.5 2,2.5, height 1.75
"SOIC-16 CASE 751B-05 ISSUE K MC74LVX138" [mm] "SOIC, 16-Leads, Body 9.90x3.90mm, Pitch 1.27mm, IPC Medium Density"
  oval 1.45x0.6 smd: 1(-2.725,4.445) 2(-2.725,3.175) 3(-2.725,1.905) 4(-2.725,0.635) 5(-2.725,-0.635) 6(-2.725,-1.905) 7(-2.725,-3.175) 8(-2.725,-4.445) 9(2.725,-4.445) 10(2.725,-3.175) 11(2.725,-1.905) 12(2.725,-0.635) 13(2.725,0.635) 14(2.725,1.905) 15(2.725,3.175) 16(2.725,4.445)
  silkscreen extent -2.85,-5 1.6,5.42, body extent -2,-5 2,5, height 1.75
TE_3-1437652-9 [mm]
  rect 2.204x2.204 hole 1.854: 1(0,0)
  round 2.204 hole 1.854: 2(9.53,0)
  silkscreen extent -6.34,-13.21 15.12,4.57
"Test Point" [mm]
  rect 1x1 smd paste-2: TP(0,0)
"Thru Test Point" [mil]
  round 60 hole 30: TH_TP(0,0)

## Part data
C1: library part "CAP ALUM 4.7UF 20% 50V SMD", "4.7µF 50V Aluminum Electrolytic Capacitors Radial, Can - SMD 2000 Hrs @ 85°C", Capacitance=4.7uF, Case/Package=Radial, Manufacturer 1=Panasonic, Max Operating Temperature=85°C, Min Operating Temperature=-40°C, Package Quantity=1, Ripple Current=31mA, Supplier Part Number 1=PCE4304CT-ND, Tolerance=20%, Voltage Rating=50V, ComponentLink1Description=https://datasheet.ciiva.com/46374/aba0000ce2-46374373.pdf, ComponentLink1URL=https://datasheet.ciiva.com/46374/aba0000ce2-46374373.pdf, ComponentLink2Description=https://datasheet.ciiva.com/14600/70255710-14600343.pdf, ComponentLink2URL=https://datasheet.ciiva.com/14600/70255710-14600343.pdf, ComponentLink3Description=https://datasheet.ciiva.com/17536/aba0000ce2-17536647.pdf, ComponentLink3URL=https://datasheet.ciiva.com/17536/aba0000ce2-17536647.pdf, ComponentLink4Description=https://datasheet.ciiva.com/24027/aba0000ce2-40801-24027083.pdf, ComponentLink4URL=https://datasheet.ciiva.com/24027/aba0000ce2-40801-24027083.pdf, ComponentLink5Description=https://datasheet.ciiva.com/31414/aba0000ce2-31414684.pdf, ComponentLink5URL=https://datasheet.ciiva.com/31414/aba0000ce2-31414684.pdf, ComponentLink6Description=https://datasheet.ciiva.com/14606/70255710-14606079.pdf, ComponentLink6URL=https://datasheet.ciiva.com/14606/70255710-14606079.pdf, Description 1="CAPACITOR ALUM ELEC, 4.7UF, 50V, 20%, SMD", Diameter=6.3mm, Height=5.4mm, Height - Seated (Max)=0.213inch, Lead Free="Lead Free", Length=5.5mm, Life (Hours)=2000Hour, Manufacturer Part Number 1=EEE-1HA4R7NP, Mount="Surface Mount,PCB", Packaging="Tape and Reel", Pricing 1="1=0.43, 10=0.302, 100=0.1986, 500=0.1471 (USD)", Radiation Hardening=No, REACH SVHC="No SVHC", Ripple Current (AC)=31mA, Stock 1=19771, Supplier 1=Digi-Key, Termination=SMD/SMT, Voltage Rating (DC)=50V, Width=650um
C2: "2.2µF ±20% 100V Ceramic Capacitor X7R 1206 (3216 Metric)", Capacitance=2.2µF, Manufacturer 1="Murata Electronics North America", Manufacturer Part Number 1=GRM31CR72A225MA73L, Operating Temperature="-55°C ~ 125°C", Package / Case="1206 (3216 Metric)", Ratings=-, Supplier Part Number 1=490-12773-1-ND, Temperature Coefficient=X7R, Tolerance=±20%, Voltage=100V, ComponentLink1Description=http://www.murata.com/~/media/webrenewal/support/library/catalog/products/capacitor/mlcc/c02e.ashx, ComponentLink1URL=http://www.murata.com/~/media/webrenewal/support/library/catalog/products/capacitor/mlcc/c02e.ashx, Height - Seated (Max)=-, Lead Spacing=-, Lead Style=-, Mounting Type="Surface Mount, MLCC", Packaging="Cut Tape (CT)", Part Status=Active, Size / Dimension="0.126\" L x 0.063\" W (3.20mm x 1.60mm)", Supplier 1=Digi-Key, Thickness (Max)="0.071\" (1.80mm)"
C3 C5 C7 C8 C11 C12 C14 C15 C18 C19 C22 C23 C24 C25 C26 C27 C28 C29 C30 C31 C32 C33 C34 C35 C36 C37 C39 C40 C41 C42 C43 C44 C45 C46 C47 C48 C49 C50 C51 C52 C53 C54 C55 C56 C57 C59 C60: "0.10µF ±10% 50V Ceramic Capacitor X7R 0603 (1608 Metric)", Capacitance=0.1µF, Manufacturer 1="AVX Corporation", Manufacturer Part Number 1=06035C104KAT2A, Operating Temperature="-55°C ~ 125°C", Package / Case="0603 (1608 Metric)", Ratings=-, Supplier Part Number 1=478-5052-1-ND, Temperature Coefficient=X7R, Tolerance=±10%, Voltage=50V, ComponentLink1Description=http://datasheets.avx.com/X7RDielectric.pdf, ComponentLink1URL=http://datasheets.avx.com/X7RDielectric.pdf, Height - Seated (Max)=-, Lead Spacing=-, Lead Style=-, Mounting Type="Surface Mount, MLCC", Packaging="Cut Tape (CT)", Part Status=Active, Size / Dimension="0.063\" L x 0.032\" W (1.60mm x 0.81mm)", Supplier 1=Digi-Key, Thickness (Max)="0.035\" (0.90mm)"
C4 C6: "4.7µF ±10% 25V Ceramic Capacitor X5R 0603 (1608 Metric)", Capacitance=4.7µF, Manufacturer 1="Murata Electronics North America", Manufacturer Part Number 1=GRM188R61E475KE11D, Operating Temperature="-55°C ~ 85°C", Package / Case="0603 (1608 Metric)", Ratings=-, Supplier Part Number 1=490-7203-1-ND, Temperature Coefficient=X5R, Tolerance=±10%, Voltage=25V, ComponentLink1Description=http://www.murata.com/~/media/webrenewal/support/library/catalog/products/capacitor/mlcc/c02e.ashx, ComponentLink1URL=http://www.murata.com/~/media/webrenewal/support/library/catalog/products/capacitor/mlcc/c02e.ashx, Height - Seated (Max)=-, Lead Spacing=-, Lead Style=-, Mounting Type="Surface Mount, MLCC", Packaging="Cut Tape (CT)", Part Status=Active, Size / Dimension="0.063\" L x 0.031\" W (1.60mm x 0.80mm)", Supplier 1=Digi-Key, Thickness (Max)="0.031\" (0.80mm)"
C9 C10: "1µF ±10% 50V Ceramic Capacitor X7R 0603 (1608 Metric)", Capacitance=1µF, Manufacturer 1="Taiyo Yuden", Manufacturer Part Number 1=UMK107AB7105KA-T, Operating Temperature="-55°C ~ 125°C", Package / Case="0603 (1608 Metric)", Ratings=-, Supplier Part Number 1=587-3247-1-ND, Temperature Coefficient=X7R, Tolerance=±10%, Voltage=50V, ComponentLink1Description=http://www.yuden.co.jp/productdata/catalog/en/mlcc_all_e.pdf, ComponentLink1URL=http://www.yuden.co.jp/productdata/catalog/en/mlcc_all_e.pdf, Height - Seated (Max)=-, Lead Spacing=-, Lead Style=-, Mounting Type="Surface Mount, MLCC", Packaging="Cut Tape (CT)", Part Status=Active, Size / Dimension="0.063\" L x 0.031\" W (1.60mm x 0.80mm)", Supplier 1=Digi-Key, Thickness (Max)="0.037\" (0.95mm)"
C13 C16 C17 C20 C21 C58: "10000pF ±5% 50V Ceramic Capacitor U2J 0603 (1608 Metric)", Capacitance=10000pF, Manufacturer 1=KEMET, Manufacturer Part Number 1=C0603C103J5JAC7867, Operating Temperature="-55°C ~ 125°C", Package / Case="0603 (1608 Metric)", Ratings=-, Supplier Part Number 1=399-13384-1-ND, Temperature Coefficient=U2J, Tolerance=±5%, Voltage=50V, ComponentLink1Description=http://www.kemet.com/docfinder?Partnumber=C0603C103J5JAC7867, ComponentLink1URL=http://www.kemet.com/docfinder?Partnumber=C0603C103J5JAC7867, Failure Rate=-, Height - Seated (Max)=-, Lead Spacing=-, Lead Style=-, Mounting Type="Surface Mount, MLCC", Packaging="Cut Tape (CT)", Part Status=Active, Size / Dimension="0.063\" L x 0.032\" W (1.60mm x 0.80mm)", Supplier 1=Digi-Key, Thickness (Max)="0.034\" (0.87mm)"
C38: "10µF ±10% 25V Ceramic Capacitor X5R 0805 (2012 Metric)", Capacitance=10µF, Manufacturer="Murata Electronics North America", Manufacturer Part Number=GRM21BR61E106KA73L, Operating Temperature="-55°C ~ 85°C", Package / Case="0805 (2012 Metric)", Ratings=-, Supplier Part Number 1=490-5523-1-ND, Temperature Coefficient=X5R, Tolerance=±10%, Voltage - Rated=25V, Applications="General Purpose", Category=Capacitors, ComponentLink1Description=http://search.murata.co.jp/Ceramy/image/img/A01X/G101/ENG/GRM21BR61E106KA73-01.pdf, ComponentLink1URL=http://search.murata.co.jp/Ceramy/image/img/A01X/G101/ENG/GRM21BR61E106KA73-01.pdf, Features=-, Height - Seated (Max)=-, Lead Spacing=-, Lead Style=-, Mounting Type="Surface Mount, MLCC", Packaging="Cut Tape (CT)", Part Status=Active, Pricing 1="1=0.3, 10=0.214, 100=0.1008, 500=0.07068, 1000=0.05851 (CAD)", RoHS="RoHS Compliant", Size / Dimension="0.079\" L x 0.049\" W (2.00mm x 1.25mm)", Stock 1=1695157, Supplier 1=Digi-Key, Thickness (Max)="0.053\" (1.35mm)"
D1: "Diode Schottky 60V 3A Surface Mount SMA", Capacitance @ Vr, F="200pF @ 4V, 1MHz", Current - Average Rectified (Io)=3A, Current - Reverse Leakage @ Vr="500µA @ 60V", Manufacturer 1="Diodes Incorporated", Manufacturer Part Number 1=B360A-13-F, Operating Temperature - Junction="-55°C ~ 150°C", Package / Case="DO-214AC, SMA", Supplier Device Package=SMA, Supplier Part Number 1=B360A-FDICT-ND, Voltage - DC Reverse (Vr) (Max)=60V, Voltage - Forward (Vf) (Max) @ If="700mV @ 3A", ComponentLink1Description=https://www.diodes.com/assets/Datasheets/ds30891.pdf, ComponentLink1URL=https://www.diodes.com/assets/Datasheets/ds30891.pdf, Diode Type=Schottky, Mounting Type="Surface Mount", Packaging="Cut Tape (CT)", Part Status=Active, Speed="Fast Recovery =< 500ns, > 200mA (Io)", Supplier 1=Digi-Key
D2: "Zener Diode 16V 5W ±5% Surface Mount DO-214AA (SMB)", Manufacture="Micro Commercial Co", Manufacture Part Number=SMBJ5353B-TP, Power (Max)=5W, Supplier Part Number 1=SMBJ5353B-TPMSCT-ND, Voltage - Forward="1.2V @ 1A", Voltage - Zener (Nom)=16V, Impedence (Max)="2.5 Ohm", Supplier 1=Digi-Key
F1: "FUSE CRTRDGE 12A 600VAC/VDC 5AG", Breaking Capacity @ Rated Voltage="100kA AC, 50kA DC", Current Rating=12A, Manufacturer=Eaton, Manufacturer Part Number=KLM-12, Operating Temperature=-, Package / Case="5AG, 10mm x 38.1mm", Supplier Part Number 1=KLM-12-ND, Applications="Electrical, Industrial", Approvals="CE, CSA, UL", Category="Circuit Protection", Class=-, ComponentLink1Description=http://www.cooperindustries.com/content/dam/public/bussmann/Electrical/Resources/product-datasheets-a/Bus_Ele_DS_2020_KLM.pdf, ComponentLink1URL=http://www.cooperindustries.com/content/dam/public/bussmann/Electrical/Resources/product-datasheets-a/Bus_Ele_DS_2020_KLM.pdf, Features=-, Fuse Type=Cartridge, Mounting Type=Holder, Packaging=Bulk, Part Status=Active, Pricing 1="10=39.155 (CAD)", Response Time=Fast, RoHS="RoHS Compliant", Size / Dimension="0.406\" Dia x 1.500\" L (10.30mm x 38.10mm)", Stock 1=0, Supplier 1=Digi-Key
K1: "General Purpose Relay SPST-NO (1 Form A) 12VDC Coil Socketable", Coil Power="1.5 W", Coil Voltage=12VDC, Manufacturer="Omron Automation and Safety", Manufacturer Part Number="MKS1XT-10 DC12", Operating Temperature="-40°C ~ 60°C", Supplier Part Number 1=Z2956-ND, Switching Voltage="220VDC - Max", Turn Off Voltage (Min)="1.8 VDC", Turn On Voltage (Max)="9.6 VDC", Category=Relays, Coil Type="Non Latching", ComponentLink1Description=http://www.ia.omron.com/data_pdf/cat/mk-s(x)_j175-e1_5_2_csm2141.pdf, ComponentLink1URL=http://www.ia.omron.com/data_pdf/cat/mk-s(x)_j175-e1_5_2_csm2141.pdf, Contact Form="SPST-NO (1 Form A)", Contact Material="Silver Tin Indium (AgSnIn)", Features=-, Mounting Type=Socketable, Packaging=Tray, Part Status=Active, Pricing 1="1=45.24, 10=42.981, 25=40.7192, 50=38.4572, 100=36.1949, 250=33.93272 (CAD)", Relay Type="General Purpose", RoHS="RoHS Compliant", Stock 1=4, Supplier 1=Digi-Key, Termination Style="Plug In"
LED1: "Yellow 590nm LED Indication - Discrete 2V 0603 (1608 Metric)", Color=Yellow, Current - Test=20mA, Lens Color=Colorless, Manufacturer="Wurth Electronics Inc.", Manufacturer Part Number=150060YS75000, Millicandela Rating=120mcd, Package / Case="0603 (1608 Metric)", Supplier Device Package=0603, Supplier Part Number 1=732-4981-1-ND, Voltage - Forward (Vf) (Typ)=2V, Category=Optoelectronics, ComponentLink1Description=http://katalog.we-online.de/led/datasheet/150060YS75000.pdf, ComponentLink1URL=http://katalog.we-online.de/led/datasheet/150060YS75000.pdf, Features=-, Height (Max)=0.80mm, Lens Style/Size="Rectangle with Flat Top, 1.10mm x 0.70mm", Lens Transparency=Clear, Mounting Type="Surface Mount", Packaging="Cut Tape (CT)", Part Status=Active, Pricing 1="1=0.21, 100=0.1617, 500=0.13964 (CAD)", RoHS="RoHS Compliant", Size / Dimension="1.60mm L x 0.80mm W", Stock 1=10523, Supplier 1=Digi-Key, Viewing Angle=140°, Wavelength - Dominant=590nm, Wavelength - Peak=595nm
LED2 LED3: "Green 572nm LED Indication - Discrete 2V 0603 (1608 Metric)", Color=Green, Current - Test=20mA, Lens Color=Colorless, Manufacturer="Wurth Electronics Inc.", Manufacturer Part Number=150060VS75000, Millicandela Rating=40mcd, Package / Case="0603 (1608 Metric)", Supplier Device Package=0603, Supplier Part Number 1=732-4980-1-ND, Voltage - Forward (Vf) (Typ)=2V, Category=Optoelectronics, ComponentLink1Description=http://katalog.we-online.de/led/datasheet/150060VS75000.pdf, ComponentLink1URL=http://katalog.we-online.de/led/datasheet/150060VS75000.pdf, Features=-, Height (Max)=0.80mm, Lens Style/Size="Rectangle with Flat Top, 1.10mm x 0.70mm", Lens Transparency=Clear, Mounting Type="Surface Mount", Packaging="Cut Tape (CT)", Part Status=Active, Pricing 1="1=0.21, 100=0.1617, 500=0.13964 (CAD)", RoHS="RoHS Compliant", Size / Dimension="1.60mm L x 0.80mm W", Stock 1=9408, Supplier 1=Digi-Key, Viewing Angle=140°, Wavelength - Dominant=570nm, Wavelength - Peak=572nm
P1: "50 Position Connector Plug, Outer Shroud Contacts Surface Mount Gold", Manufacturer 1="Amphenol FCI", Manufacturer Part Number 1=10132797-055100LF, Supplier Part Number 1=609-5226-1-ND, ComponentLink1Description=http://portal.fciconnect.com/Comergent//fci/drawing/10132797.pdf, ComponentLink1URL=http://portal.fciconnect.com/Comergent//fci/drawing/10132797.pdf, Connector Type="Plug, Outer Shroud Contacts", Contact Finish=Gold, Contact Finish Thickness="1µin (0.025µm)", Height Above Board="0.169\" (4.30mm)", Mated Stacking Heights=5mm, Mounting Type="Surface Mount", Number of Positions=50, Number of Rows=2, Packaging="Cut Tape (CT)", Part Status=Active, Pitch="0.020\" (0.50mm)", Series="BergStak Plug", Supplier 1=Digi-Key
P2 P3 P17: "2 Positions Header, Shrouded Connector 0.138\" (3.50mm) Through Hole Gold", Current Rating=-, Insulation Color=Black, Manufacturer 1="Molex, LLC", Manufacturer Part Number 1=1722861302, Material Flammability Rating="UL94 V-0", Operating Temperature="-40°C ~ 120°C", Supplier Part Number 1=WM11673-ND, Voltage=400V, ComponentLink1Description=http://www.molex.com/pdm_docs/sd/1722861302_sd.pdf, ComponentLink1URL=http://www.molex.com/pdm_docs/sd/1722861302_sd.pdf, Connector Type=Header, Contact Finish - Mating=Gold, Contact Finish - Post=Tin, Contact Finish Thickness - Mating="30µin (0.76µm)", Contact Finish Thickness - Post="60µin (1.52µm)", Contact Length - Mating=-, Contact Length - Post="0.126\" (3.20mm)", Contact Material="Copper Alloy", Contact Shape=Square, Contact Type="Male Pin", Fastening Type="Latch Holder", Ingress Protection=-, Insulation Height="0.465\" (11.80mm)", Insulation Material="Liquid Crystal Polymer (LCP)", Mated Stacking Heights=26.99mm, Mounting Type="Through Hole", Number of Positions=2, Number of Positions Loaded=All, Number of Rows=1, Overall Contact Length=-, Packaging=Tray, Part Status=Active, Pitch - Mating="0.138\" (3.50mm)", Row Spacing - Mating=-, Series=UltraFit, Shrouding="Shrouded - 4 Wall", Style="Board to Board or Cable", Supplier 1=Digi-Key, Termination="Kinked Pin, Solder"
P4 P5 P6 P7 P8 P16: "Barrier Terminal Blocks 2P TRI-BARRIER .375", Color=Black, Current Rating=5A, Flammability Rating="UL94 V-0", Manufacturer="TE Connectivity", Manufacturer Part Number=6PCV-02-006, Max Current Rating=25A, Package Quantity=270, Supplier Part Number 1=A98481-ND, Voltage=300V, Category="Terminal Blocks", ComponentLink1Description=https://datasheet.ciiva.com/7978/1650932-7978603.pdf?src-supplier=Element14, ComponentLink1URL=https://datasheet.ciiva.com/7978/1650932-7978603.pdf?src-supplier=Element14, Contact Material="Copper Alloy", Contact Plating=Tin, ELV=Compliant, Height=0.625inch, Housing Color=Black, Housing Material=Thermoplastic, Length=0.811inch, Mount="Through Hole", Mounting Ears="No (Without)", Mounting Insert="No (Without)", Number of Circuits=2, Number of Contacts=2, Number of Levels=1, Number of Positions=2, Number of Rows=1, Orientation=Straight, Packaging=Bulk, Pitch=9.53mm, Pricing 1="1=1.63000, 10=1.14400, 25=1.06680, 50=0.96820, 100=0.96400, 250=0.81404, 500=0.77122, 1000=0.68552, 5000=0.55699 (USD)", REACH SVHC=Unknown, RoHS=Yes, Stock 1=8088, Supplier 1=Digi-Key, Terminal Material="Copper Alloy", Termination=Solder, Voltage Rating=300V, Width=0.7inch, Wire Gauge (Max)=12AWG, Wire Gauge (Min)=22AWG, Wire/Cable Gauge=22AWG
P9 P10 P11 P12 P13 P14: "5 Positions Header Connector 0.138\" (3.50mm) Through Hole Tin", Current Rating=-, Insulation Color=Black, Manufacturer 1="Molex, LLC", Manufacturer Part Number 1=1722871105, Material Flammability Rating="UL94 V-0", Operating Temperature="-40°C ~ 105°C", Supplier Part Number 1=WM11704-ND, Voltage=400V, ComponentLink1Description=http://www.molex.com/pdm_docs/sd/1722871105_sd.pdf, ComponentLink1URL=http://www.molex.com/pdm_docs/sd/1722871105_sd.pdf, Connector Type=Header, Contact Finish - Mating=Tin, Contact Finish - Post=Tin, Contact Finish Thickness - Mating="60µin (1.52µm)", Contact Finish Thickness - Post="60µin (1.52µm)", Contact Length - Mating=-, Contact Length - Post="0.126\" (3.20mm)", Contact Material="Copper Alloy", Contact Shape=Square, Contact Type="Male Pin", Fastening Type="Latch Holder", Ingress Protection=-, Insulation Height="0.465\" (11.80mm)", Insulation Material="Liquid Crystal Polymer (LCP)", Mated Stacking Heights=26.99mm, Mounting Type="Through Hole", Number of Positions=5, Number of Positions Loaded=All, Number of Rows=1, Overall Contact Length=-, Packaging=Tray, Part Status=Active, Pitch - Mating="0.138\" (3.50mm)", Row Spacing - Mating=-, Series=UltraFit, Shrouding="Shrouded - 4 Wall", Style="Board to Cable/Wire", Supplier 1=Digi-Key, Termination=Solder
P15: "Connector Header Through Hole 6 position 0.118\" (3.00mm)", Current Rating=-, Insulation Color=Black, Manufacturer="Molex, LLC", Manufacturer Part Number=0430450827, Material Flammability Rating="UL94 V-0", Supplier Part Number 1=WM10684-ND, Applications="General Purpose, Medical, Military, Telecommunications", Category="Connectors, Interconnects", ComponentLink1Description=https://www.molex.com/pdm_docs/sd/430450627_sd.pdf, ComponentLink1URL=https://www.molex.com/pdm_docs/sd/430450627_sd.pdf, ComponentLink2Description=https://www.molex.com/pdm_docs/sd/430450827_sd.pdf, ComponentLink2URL=https://www.molex.com/pdm_docs/sd/430450827_sd.pdf, Connector Type=Header, Contact Finish - Mating=Tin, Contact Finish - Post=Tin, Contact Finish Thickness - Mating="60.0µin (1.52µm)", Contact Finish Thickness - Post=-, Contact Length - Mating=-, Contact Length - Post="0.125\" (3.18mm)", Contact Material=Brass, Contact Shape=Square, Contact Type="Male Pin", Fastening Type="Locking Ramp", Features="Board Guide", Ingress Protection=-, Insulation Height="0.390\" (9.91mm)", Insulation Material="Liquid Crystal Polymer (LCP), Glass Filled", Mated Stacking Heights=-, Mounting Type="Through Hole", Number of Positions=6, Number of Positions Loaded=All, Number of Rows=2, Operating Temperature=-, Overall Contact Length=-, Packaging=Tray, Part Status=Active, Pitch - Mating="0.118\" (3.00mm)", Pricing 1="1=2.69, 10=2.445, 25=2.2964, 50=2.1964, 100=2.0965, 250=1.8968, 500=1.74704, 1440=1.49746, 2880=1.39763 (CAD)", RoHS="RoHS Compliant", Row Spacing - Mating="0.118\" (3.00mm)", Shrouding="Shrouded - 4 Wall", Stock 1=5553, Style="Board to Cable/Wire", Supplier 1=Digi-Key, Termination=Solder, Voltage Rating=-
Q1: Current - Continuous Drain (Id) @ 25°C=8.7A, Drain to Source Voltage (Vdss)=30V, Drive Voltage (Max Rds On,  Min Rds On)="2.5V, 4.5V", Input Capacitance (Ciss) (Max) @ Vds="1019pF @ 25V", Manufacturer 1="Infineon Technologies", Manufacturer Part Number 1=IRLHS6342TRPBF, Operating Temperature="-55°C ~ 150°C (TJ)", Package / Case=6-PowerVDFN, Power Dissipation (Max)=2.1W, Supplier Device Package="6-PQFN (2x2)", Supplier Part Number 1=IRLHS6342TRPBFCT-ND, Category="Discrete Semiconductor Products", ComponentLink1Description=http://www.infineon.com/dgdl/irlhs6342pbf.pdf?fileId=5546d462533600a401535663b52625ad, ComponentLink1URL=http://www.infineon.com/dgdl/irlhs6342pbf.pdf?fileId=5546d462533600a401535663b52625ad, Description 1="MOSFET N-CH 30V 8.7A 2X2 PQFN", FET Feature=-, FET Type=N-Channel, Gate Charge (Qg) (Max) @ Vgs="11nC @ 4.5V", Mounting Type="Surface Mount", Packaging="Cut Tape (CT)", Part Status=Active, Pricing 1="1=0.79, 10=0.685, 100=0.5118, 500=0.4022, 1000=0.31079 (CAD)", Rds On (Max) @ Id, Vgs="15.5 mOhm @ 8.5A, 4.5V", RoHS="RoHS Compliant", Stock 1=9984, Supplier 1=Digi-Key, Technology="MOSFET (Metal Oxide)", Vgs (Max)=±12V, Vgs(th) (Max) @ Id="1.1V @ 10µA"
R1 R13: "0 Ohms Jumper 0.75W, 3/4W Chip Resistor 1206 (3216 Metric) Automotive AEC-Q200 Metal Foil", Manufacturer="Stackpole Electronics Inc.", Manufacturer Part Number=HCJ1206ZT0R00, Operating Temperature="-55°C ~ 155°C", Package / Case="1206 (3216 Metric)", Power (Watts)=3/4W, Resistance=0.0, Supplier Device Package=1206, Supplier Part Number 1=HCJ1206ZT0R00CT-ND, Temperature Coefficient=-, Tolerance=Jumper, Category=Resistors, ComponentLink1Description=https://www.seielect.com/catalog/SEI-HCJ.pdf, ComponentLink1URL=https://www.seielect.com/catalog/SEI-HCJ.pdf, Composition="Metal Foil", Failure Rate=-, Features="Automotive AEC-Q200", Height - Seated (Max)="0.032\" (0.80mm)", Packaging="Cut Tape (CT)", Part Status=Active, Pricing 1="1=0.82, 10=0.583, 25=0.4552, 50=0.3852, 100=0.3034, 250=0.25676, 500=0.21006, 1000=0.16337 (CAD)", RoHS="RoHS Compliant", Size / Dimension="0.122\" L x 0.061\" W (3.10mm x 1.55mm)", Stock 1=1029426, Supplier 1=Digi-Key
R2 R16 R17: "4.7k Ohm ±1% 0.1W, 1/10W Chip Resistor 0603 (1608 Metric) Moisture Resistant Thick Film", Manufacturer 1=Yageo, Manufacturer Part Number 1=RC0603FR-074K7L, Operating Temperature="-55°C ~ 155°C", Package / Case="0603 (1608 Metric)", Power (Watts)=1/10W, Resistance (Ohms)=4.7k, Supplier Device Package=0603, Supplier Part Number 1=311-4.70KHRCT-ND, Temperature Coefficient=±100ppm/°C, Tolerance=±1%, Category=Resistors, ComponentLink1Description=http://www.yageo.com/documents/recent/PYu-RC_Group_51_RoHS_L_7.pdf, ComponentLink1URL=http://www.yageo.com/documents/recent/PYu-RC_Group_51_RoHS_L_7.pdf, Composition="Thick Film", Description 1="RES SMD 4.7K OHM 1% 1/10W 0603", Failure Rate=-, Features="Moisture Resistant", Height - Seated (Max)="0.022\" (0.55mm)", Packaging="Cut Tape (CT)", Part Status=Active, Pricing 1="1=0.16, 10=0.022, 100=0.0089, 1000=0.00402, 2500=0.00349 (CAD)", RoHS="RoHS Compliant", Size / Dimension="0.063\" L x 0.031\" W (1.60mm x 0.80mm)", Stock 1=3487566, Supplier 1=Digi-Key
R3: "22.1 Ohm ±1% 0.1W, 1/10W Chip Resistor 0603 (1608 Metric) Moisture Resistant Thick Film", Manufacturer 1=Yageo, Manufacturer Part Number 1=RC0603FR-0722R1L, Operating Temperature="-55°C ~ 155°C", Package / Case="0603 (1608 Metric)", Power=1/10W, Resistance=22.1, Supplier Device Package=0603, Supplier Part Number 1=311-22.1HRCT-ND, Temperature Coefficient=±100ppm/°C, Tolerance=±1%, ComponentLink1Description=http://www.yageo.com/documents/recent/PYu-RC_Group_51_RoHS_L_7.pdf, ComponentLink1URL=http://www.yageo.com/documents/recent/PYu-RC_Group_51_RoHS_L_7.pdf, Composition="Thick Film", Failure Rate=-, Height - Seated (Max)="0.022\" (0.55mm)", Packaging="Cut Tape (CT)", Part Status=Active, Size / Dimension="0.063\" L x 0.031\" W (1.60mm x 0.80mm)", Supplier 1=Digi-Key
R4: "RES SMD 10K OHM 1% 1/10W 0603", Manufacturer 1=Yageo, Manufacturer Part Number 1=RC0603FR-0710KL, Operating Temperature="-55°C ~ 155°C", Package / Case="0603 (1608 Metric)", Power=1/10W, Resistance=10k, Supplier Device Package=0603, Supplier Part Number 1=311-10.0KHRCT-ND, Temperature Coefficient=±100ppm/°C, Tolerance=±1%, ComponentLink1Description=http://www.yageo.com/documents/recent/PYu-RC_Group_51_RoHS_L_7.pdf, ComponentLink1URL=http://www.yageo.com/documents/recent/PYu-RC_Group_51_RoHS_L_7.pdf, Composition="Thick Film", Failure Rate=-, Height - Seated (Max)="0.022\" (0.55mm)", Packaging="Cut Tape (CT)", Part Status=Active, Size / Dimension="0.063\" L x 0.031\" W (1.60mm x 0.80mm)", Supplier 1=Digi-Key
R5: "3.3k Ohm ±1% 0.25W, 1/4W Chip Resistor 0603 (1608 Metric) Automotive AEC-Q200, Pulse Withstanding Thick Film", Manufacturer 1="Panasonic Electronic Components", Manufacturer Part Number 1=ERJ-PA3F3301V, Operating Temperature="-55°C ~ 155°C", Package / Case="0603 (1608 Metric)", Power=1/4W, Resistance=3.3k, Supplier Device Package=0603, Supplier Part Number 1=P3.3KBYCT-ND, Temperature Coefficient=±100ppm/°C, Tolerance=±1%, ComponentLink1Description=https://industrial.panasonic.com/cdbs/www-data/pdf/RDO0000/AOA0000C291.pdf, ComponentLink1URL=https://industrial.panasonic.com/cdbs/www-data/pdf/RDO0000/AOA0000C291.pdf, Composition="Thick Film", Failure Rate=-, Height - Seated (Max)="0.022\" (0.55mm)", Packaging="Cut Tape (CT)", Part Status=Active, Size / Dimension="0.063\" L x 0.031\" W (1.60mm x 0.80mm)", Supplier 1=Digi-Key
R6 R9 R10 R12 R22 R23: "RES SMD 470K OHM 1% 1/4W 0603", Manufacturer 1="Panasonic Electronic Components", Manufacturer Part Number 1=ERJ-PA3F4703V, Operating Temperature="-55°C ~ 155°C", Package / Case="0603 (1608 Metric)", Power=1/4W, Resistance=470k, Supplier Device Package=0603, Supplier Part Number 1=P470KBYCT-ND, Temperature Coefficient=±100ppm/°C, Tolerance=±1%, ComponentLink1Description=https://industrial.panasonic.com/cdbs/www-data/pdf/RDO0000/AOA0000C291.pdf, ComponentLink1URL=https://industrial.panasonic.com/cdbs/www-data/pdf/RDO0000/AOA0000C291.pdf, Composition="Thick Film", Failure Rate=-, Height - Seated (Max)="0.022\" (0.55mm)", Packaging="Cut Tape (CT)", Part Status=Active, Size / Dimension="0.063\" L x 0.031\" W (1.60mm x 0.80mm)", Supplier 1=Digi-Key
R7 R11 R18 R20 R24 R26 R42: "100 Ohm ±1% 0.1W, 1/10W Chip Resistor 0603 (1608 Metric) Moisture Resistant Thick Film", Manufacturer 1=Yageo, Manufacturer Part Number 1=RC0603FR-07100RL, Operating Temperature="-55°C ~ 155°C", Package / Case="0603 (1608 Metric)", Power=1/10W, Resistance=100, Supplier Device Package=0603, Supplier Part Number 1=311-100HRCT-ND, Temperature Coefficient=±100ppm/°C, Tolerance=±1%, ComponentLink1Description=http://www.yageo.com/documents/recent/PYu-RC_Group_51_RoHS_L_7.pdf, ComponentLink1URL=http://www.yageo.com/documents/recent/PYu-RC_Group_51_RoHS_L_7.pdf, Composition="Thick Film", Failure Rate=-, Height - Seated (Max)="0.022\" (0.55mm)", Packaging="Cut Tape (CT)", Part Status=Active, Size / Dimension="0.063\" L x 0.031\" W (1.60mm x 0.80mm)", Supplier 1=Digi-Key
R8 R14 R15 R21 R25 R27: "RES SMD 26.1K OHM 1% 1/10W 0603", Manufacturer 1=Yageo, Manufacturer Part Number 1=RC0603FR-0726K1L, Operating Temperature="-55°C ~ 155°C", Package / Case="0603 (1608 Metric)", Power=1/10W, Resistance=26.1k, Supplier Device Package=0603, Supplier Part Number 1=311-26.1KHRCT-ND, Temperature Coefficient=±100ppm/°C, Tolerance=±1%, ComponentLink1Description=http://www.yageo.com/documents/recent/PYu-RC_Group_51_RoHS_L_7.pdf, ComponentLink1URL=http://www.yageo.com/documents/recent/PYu-RC_Group_51_RoHS_L_7.pdf, Composition="Thick Film", Failure Rate=-, Height - Seated (Max)="0.022\" (0.55mm)", Packaging="Cut Tape (CT)", Part Status=Active, Size / Dimension="0.063\" L x 0.031\" W (1.60mm x 0.80mm)", Supplier 1=Digi-Key
R19: "RES SMD 510 OHM 5% 1/10W 0603", Manufacturer 1=Yageo, Manufacturer Part Number 1=RC0603JR-07510RL, Operating Temperature="-55°C ~ 155°C", Package / Case="0603 (1608 Metric)", Power=1/10W, Resistance=510, Supplier Device Package=0603, Supplier Part Number 1=311-510GRCT-ND, Temperature Coefficient=±100ppm/°C, Tolerance=±5%, ComponentLink1Description=http://www.yageo.com/documents/recent/PYu-RC_Group_51_RoHS_L_7.pdf, ComponentLink1URL=http://www.yageo.com/documents/recent/PYu-RC_Group_51_RoHS_L_7.pdf, Composition="Thick Film", Failure Rate=-, Height - Seated (Max)="0.022\" (0.55mm)", Packaging="Cut Tape (CT)", Part Status=Active, Size / Dimension="0.063\" L x 0.031\" W (1.60mm x 0.80mm)", Supplier 1=Digi-Key